# Altium PCB apexvent.PcbDoc
Units mil, origin at the board's own origin, x right, y up, seen from the top; angles counter-clockwise.
Board outline 5000 x 5000 mil, 2 copper layers (Top Layer, Bottom Layer), stack 65.3 mil thick; 10 components, 2 nets, 29 pads, 2 vias.
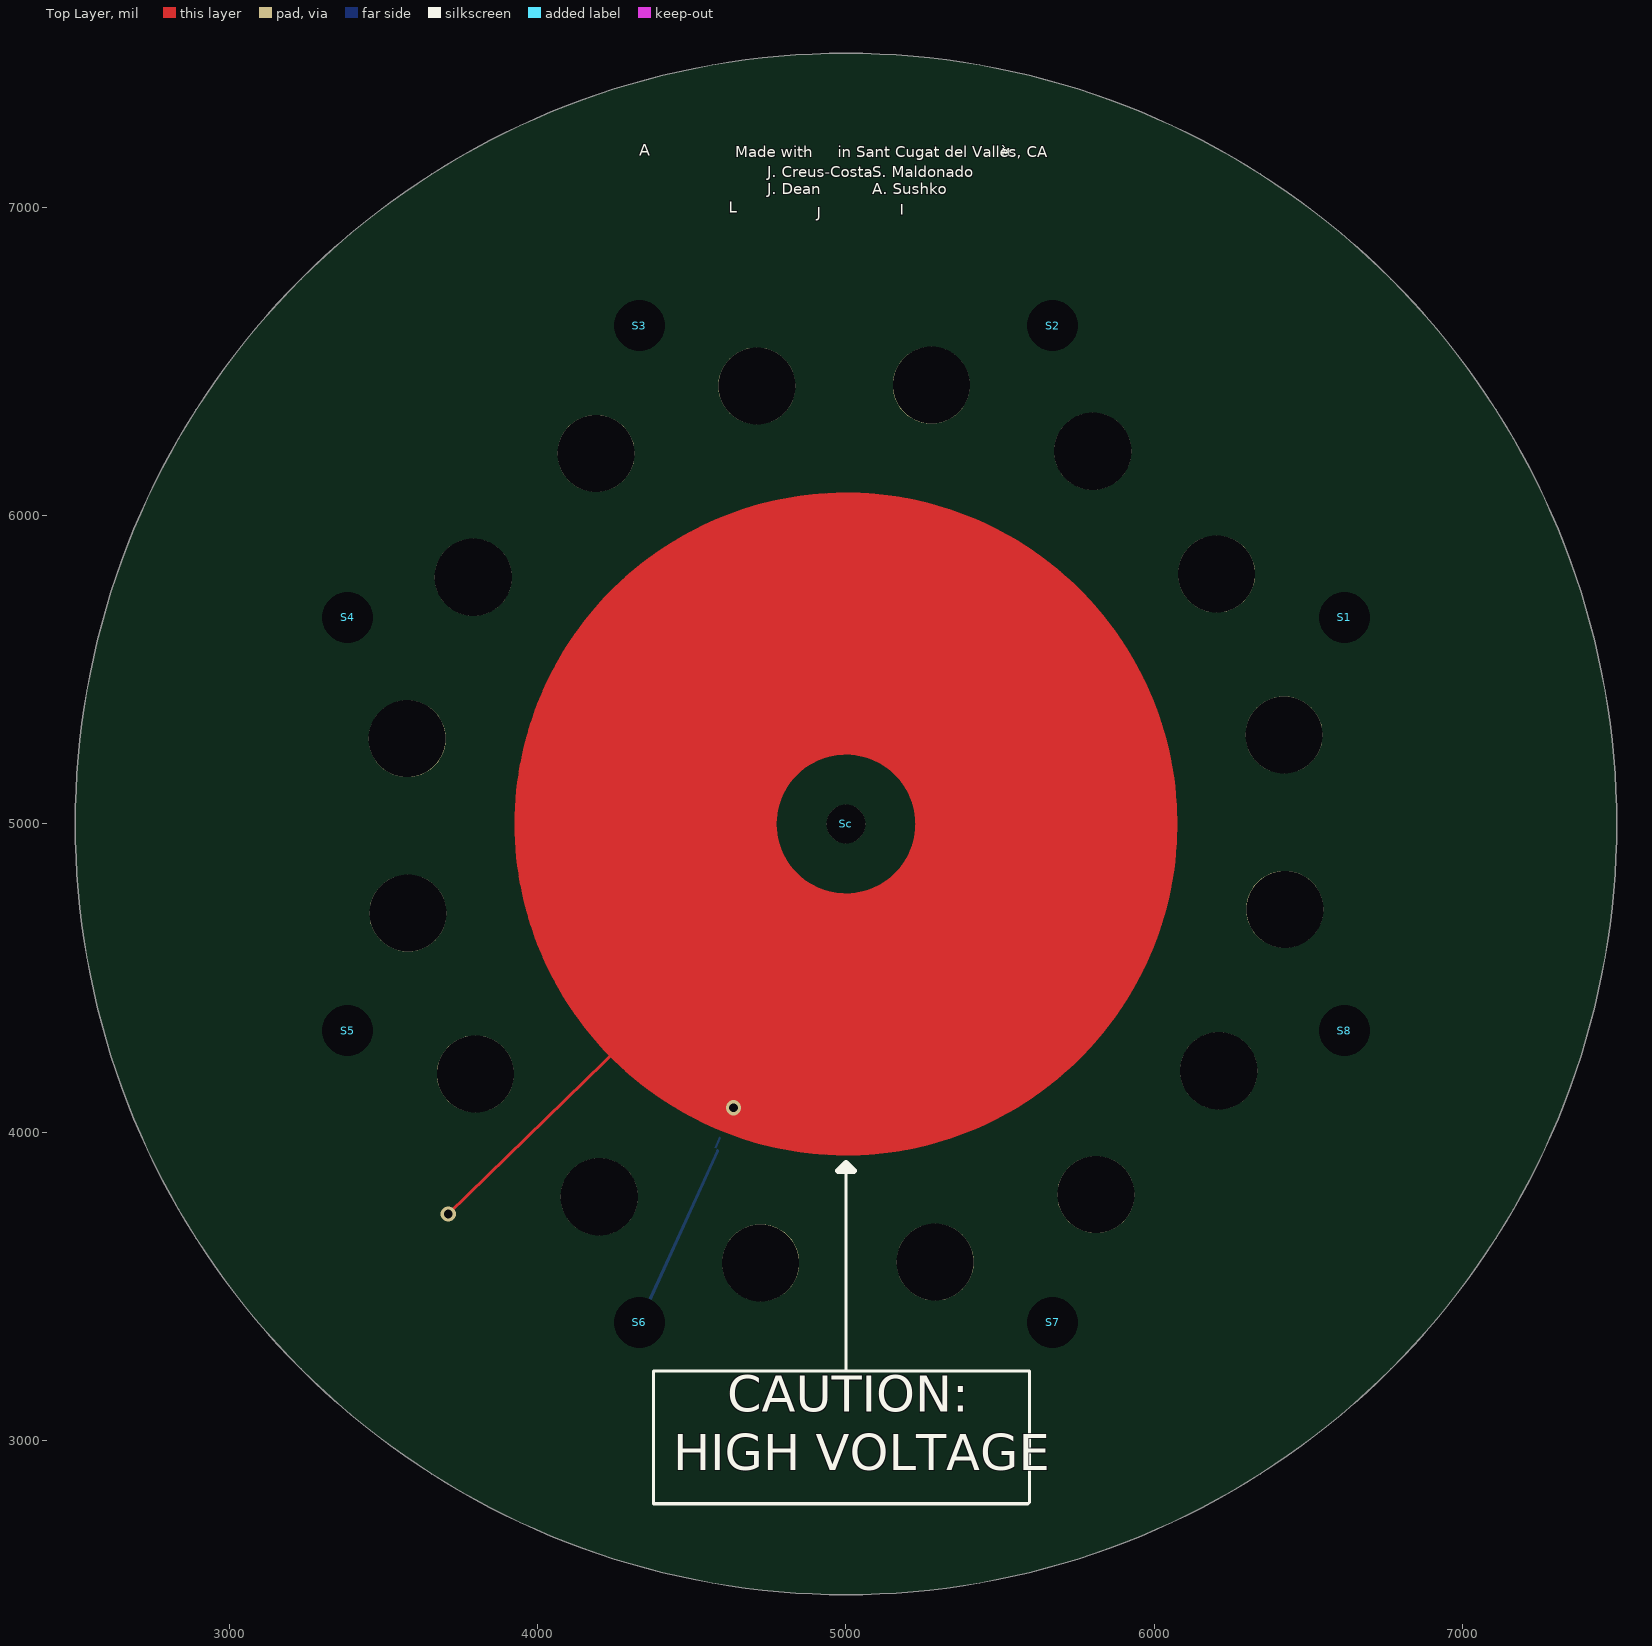
[diagram p0: Top Layer view]
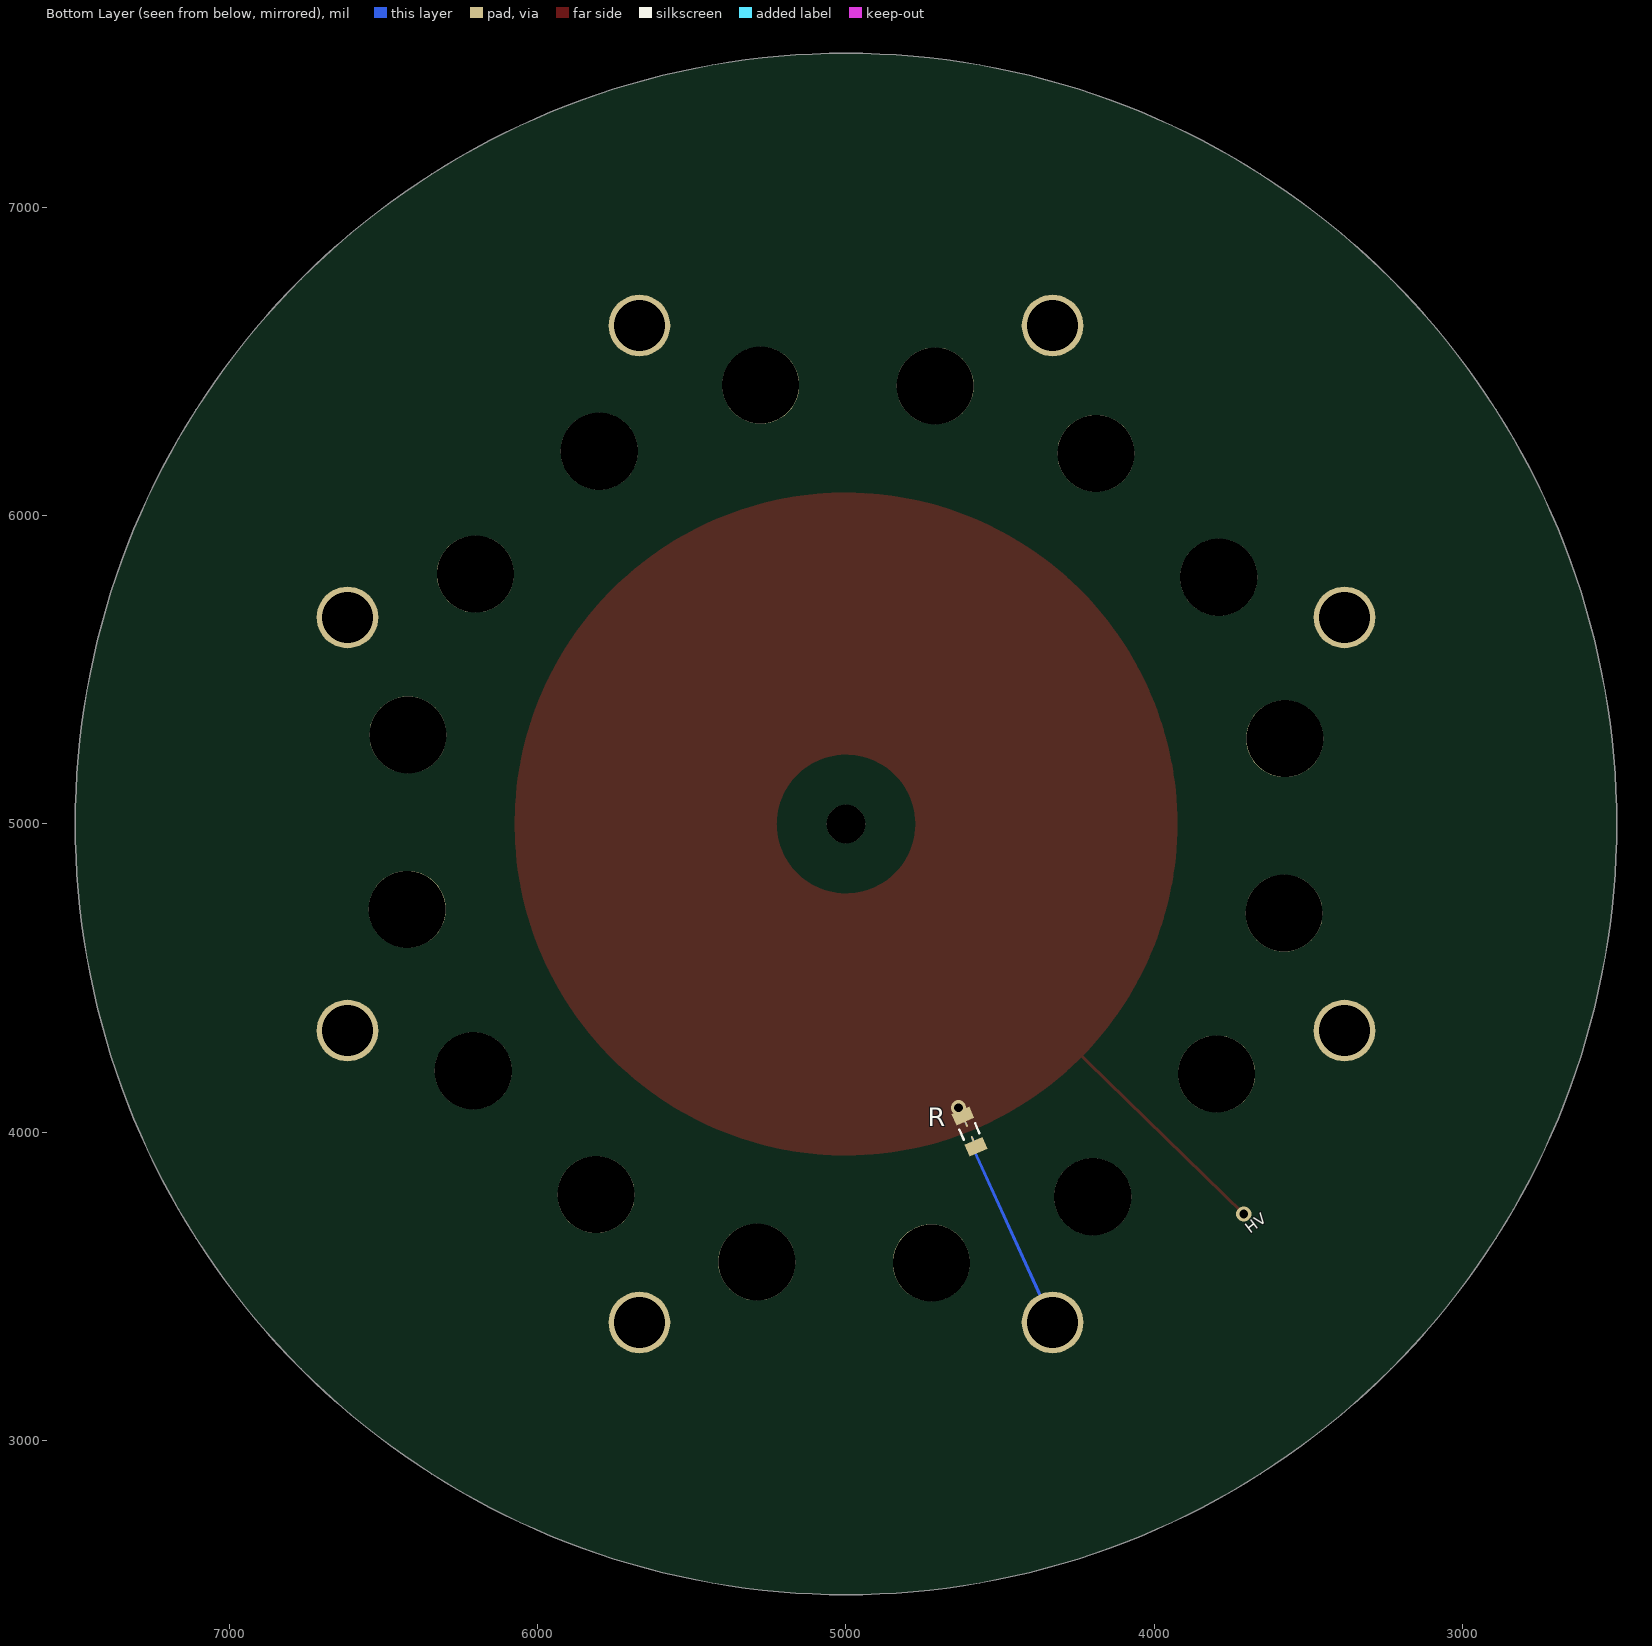
[diagram p1: Bottom Layer view, seen from below]

## Layer stack, top to bottom
Top Solder: solder mask 0.4, Solder Resist, Dk 3.5
Top Layer: signal copper 1.4
Dielectric 1: dielectric 62.5, FR-4, Dk 4.8
Bottom Layer: signal copper 1.4
Bottom Solder: solder mask 0.4, Solder Resist, Dk 3.5

## Board outline
5000,2500 cw(c5000,5000) 2500,5000 cw(c5000,5000) 5000,7500 cw(c5000,5000) 7500,5000 cw(c5000,5000)

## Design rules (kind name [scope] priority, off if disabled: settings)
Clearance [All] p1: gap=10 ignorepadtopadclearanceinfootprint=FALSE except(0: Arc-Hole Track-Hole SMDPad-Hole THPad-Hole Via-Hole Fill-Hole Poly-Hole Region-Hole Text-Hole)
HoleSize [All] p1: absolutevalues=TRUE maxlimit=247 minlimit=10 maxpercent=80.000 minpercent=20.000
PolygonConnect [All] p1: connectstyle=Relief reliefconductorwidth=10 reliefentries=4 polygonreliefangle="90 Angle" airgapwidth=10
RoutingVias [All] p1: holewidth=28 width=50 viastyle="Through Hole" minholewidth=28 minwidth=50 maxholewidth=28 maxwidth=50
SolderMaskExpansion [All] p1: expansion=4
Width [All] p1: maxlimit=10 minlimit=10 preferedwidth=10
29 further rules are at their usual default settings.

## Components (designator, comment, footprint, x,y, rotation, side; value= is the part's Value field where it differs from the comment)
R "RES_0.001_OHM_1W_1%_1206" R1206_SHUNT 4599.77,4003.01 r247 bottom net-tie (schematic designator R?)
S1 "4-40 Machine screw" SCREW_4-40#1 6445,5615 r0 top
S2 "4-40 Machine screw" SCREW_4-40#2 8895,2740 r0 top
S3 "4-40 Machine screw" SCREW_4-40#3 9145,2740 r0 top
S4 "4-40 Machine screw" SCREW_4-40#4 9390,2740 r0 top
S5 "4-40 Machine screw" SCREW_4-40#5 7240,3605 r0 top
S6 "4-40 Machine screw" SCREW_4-40#6 7490,3605 r0 top
S7 "4-40 Machine screw" SCREW_4-40#7 7740,3605 r0 top
S8 "4-40 Machine screw" SCREW_4-40#8 7985,3605 r0 top
Sc "4-40 Machine screw" SCREW_4-40#9 9940,2740 r0 top

## Footprints (in the part's own frame and the unit in brackets; to place one, negate y for a bottom-side part, rotate by r counter-clockwise, add the part's x,y. Pads: shape width x height; smd on the part's side, far side on the other; paste and mask are expansions set on the pad)
R1206_SHUNT [mm] "Chip Resistor, 2-Leads, Body 3.1x1.6mm, IPC High Density"
  rect 1.05x1.6 smd: 1(-1.375,0) 2(1.375,0)
  rrect100% 0.457x0.152 smd: 3(-0.635,0) 4(0.635,0)
  Top Layer region: 0.508,0.076 1.524,0.076 1.524,-0.076 0.508,-0.076
  Top Layer region: -1.524,0.076 -0.508,0.076 -0.508,-0.076 -1.524,-0.076
  silkscreen extent -0.45,-0.7 0.45,0.7, body extent -1.6,-0.8 1.6,0.8, height 0.6
SCREW_4-40#1 [mil] "4-40 machine screw. Mmm.. tasty"
  round 0 / inner round 200 / far side round 200 hole 166 unplated: 1(172,55)
SCREW_4-40#2 [mil] "4-40 machine screw. Mmm.. tasty"
  round 0 / inner round 200 / far side round 200 hole 166 unplated: 1(-3225,3877)
SCREW_4-40#3 [mil] "4-40 machine screw. Mmm.. tasty"
  round 0 / inner round 200 / far side round 200 hole 166 unplated: 1(-4815,3877)
SCREW_4-40#4 [mil] "4-40 machine screw. Mmm.. tasty"
  round 0 / inner round 200 / far side round 200 hole 166 unplated: 1(-6007,2930)
SCREW_4-40#5 [mil] "4-40 machine screw. Mmm.. tasty"
  round 0 / inner round 200 / far side round 200 hole 166 unplated: 1(-3857,725)
SCREW_4-40#6 [mil] "4-40 machine screw. Mmm.. tasty"
  round 0 / inner round 200 / far side round 200 hole 166 unplated: 1(-3160,-222)
SCREW_4-40#7 [mil] "4-40 machine screw. Mmm.. tasty"
  round 0 / inner round 200 / far side round 200 hole 166 unplated: 1(-2070,-222)
SCREW_4-40#8 [mil] "4-40 machine screw. Mmm.. tasty"
  round 0 / inner round 200 / far side round 200 hole 166 unplated: 1(-1368,725)
SCREW_4-40#9 [mil] "4-40 machine screw. Mmm.. tasty"
  round 125 hole 125 unplated: 1(-4940,2260)

## Part data
R: "RES 0.001 OHM 1W 1% 1206", Manufacturer="Stackpole Electronics Inc", Manufacturer Part Number=CSNL1206FT1L00, Package / Case="1206 (3216 Metric)", Power (Watts)=1W, Resistance (Ohms)=0.001, Supplier Device Package=1206, Supplier Part Number 1=CSNL1206FT1L00CT-ND, Temperature Coefficient=±50ppm/°C, Tolerance=±1%, Category=Resistors, ComponentLink1Description=http://www.seielect.com/catalog/SEI-CSNL.pdf, ComponentLink1URL=Datasheet, Composition="Metal Foil", Features="Current Sense", Height="0.035\" (0.90mm)", Number of Terminations=2, Packaging="Cut Tape (CT)", Pricing 1="1=1.05, 10=0.742, 50=0.56, 100=0.49, 250=0.434, 500=0.364, 1000=0.28 (USD)", RoHS="RoHS Compliant", Size / Dimension="0.126\" L x 0.063\" W (3.20mm x 1.60mm)", Stock 1=28114, Supplier 1=Digi-Key
S1 S2 S3 S4 S5 S6 S7 S8 Sc: library part SCREW_4-40, Supplier 1=Digi-Key

## Free pads (board coordinates)
  round 250 hole 250 unplated: 3(3576.64,5276.67) 3(3579.11,4710.92) 3(3790.87,5800.31) 3(3797.9,4189.17) 3(4189.17,6202.1) 3(4199.69,3790.87) 3(4710.92,6420.89) 3(4723.33,3576.64) 3(5276.67,6423.36) 3(5289.08,3579.11) 3(5800.31,6209.13) 3(5810.83,3797.9) 3(6202.1,5810.83) 3(6209.13,4199.69) 3(6420.89,5289.08) 3(6423.36,4723.33)

## Via types
v1: diameter 50, hole 28, Top Layer to Bottom Layer, 2 vias

## Nets (pads, with @x,y where several pads share a name; then routed paths per layer and width w, separated by ;. In a path a pad name is that pad's centre, name@x,y a point inside that pad or via, vN(x,y) a via of type N, cw(c..) or ccw(c..) an arc to the next point about the centre after c; other vN are vias at no path point)
GND: R.2 S6.1 | length 612.3
  Bottom Layer w10: S6.1 R.2@4583.85,3940.17
HV: R.1 | length 4879.6
  Top Layer w10: v1(3710,3735) 4280,4290
  Top Layer w850: 5650,5000 ccw(c5000,5000) 5650,5000
  other v1: 4635,4080
pads on no net: R.3 R.4 S1.1 S2.1 S3.1 S4.1 S5.1 S7.1 S8.1 Sc.1

## Silkscreen, mask and mechanical layers (free items; w line width, h text height)
Top Overlay:
  lines w10: 5000,3225 5000,3900 ; 5590,2795 4375,2795 4375,3225 5595,3225 5595,2800
  lines w20: 4975,3875 5000,3900 5025,3875 4975,3875
  text "H" at 4860,7175 h10
  text "M" at 5505,7160 h40
  text "A" at 4330,7155 h65
  text "Made with     in Sant Cugat del Vallès, CA" at 4640,7150 h60
  text "J. Creus-Costa" at 4745,7085 h60
  text "S. Maldonado" at 5085,7085 h60
  text "J. Dean" at 4745,7030 h60
  text "A. Sushko" at 5085,7030 h60
  text "L" at 4620,6970 h60
  text "I" at 5175,6965 h60
  text "J" at 4905,6955 h60
  text "CAUTION:" at 4615,3055 h200
  text "HIGH VOLTAGE" at 4440,2865 h200
Bottom Overlay:
  text "HV" at 3680,3660 h60 r322.59
Mechanical 1:
  circle w10: c5000,5000 r2500
  lines w10: 5590,2795 5595,2800